# Altium PCB Smartknob.PcbDoc (part 2 of 2)
Units mm, origin at the board's own origin, x right, y up, seen from the top; angles counter-clockwise.
Board outline 81.2 x 81.2 mm, 4 copper layers (Top Layer, Int1, Int2, Bottom Layer), stack 1.109 mm thick; 105 components, 69 nets, 354 pads, 140 vias.
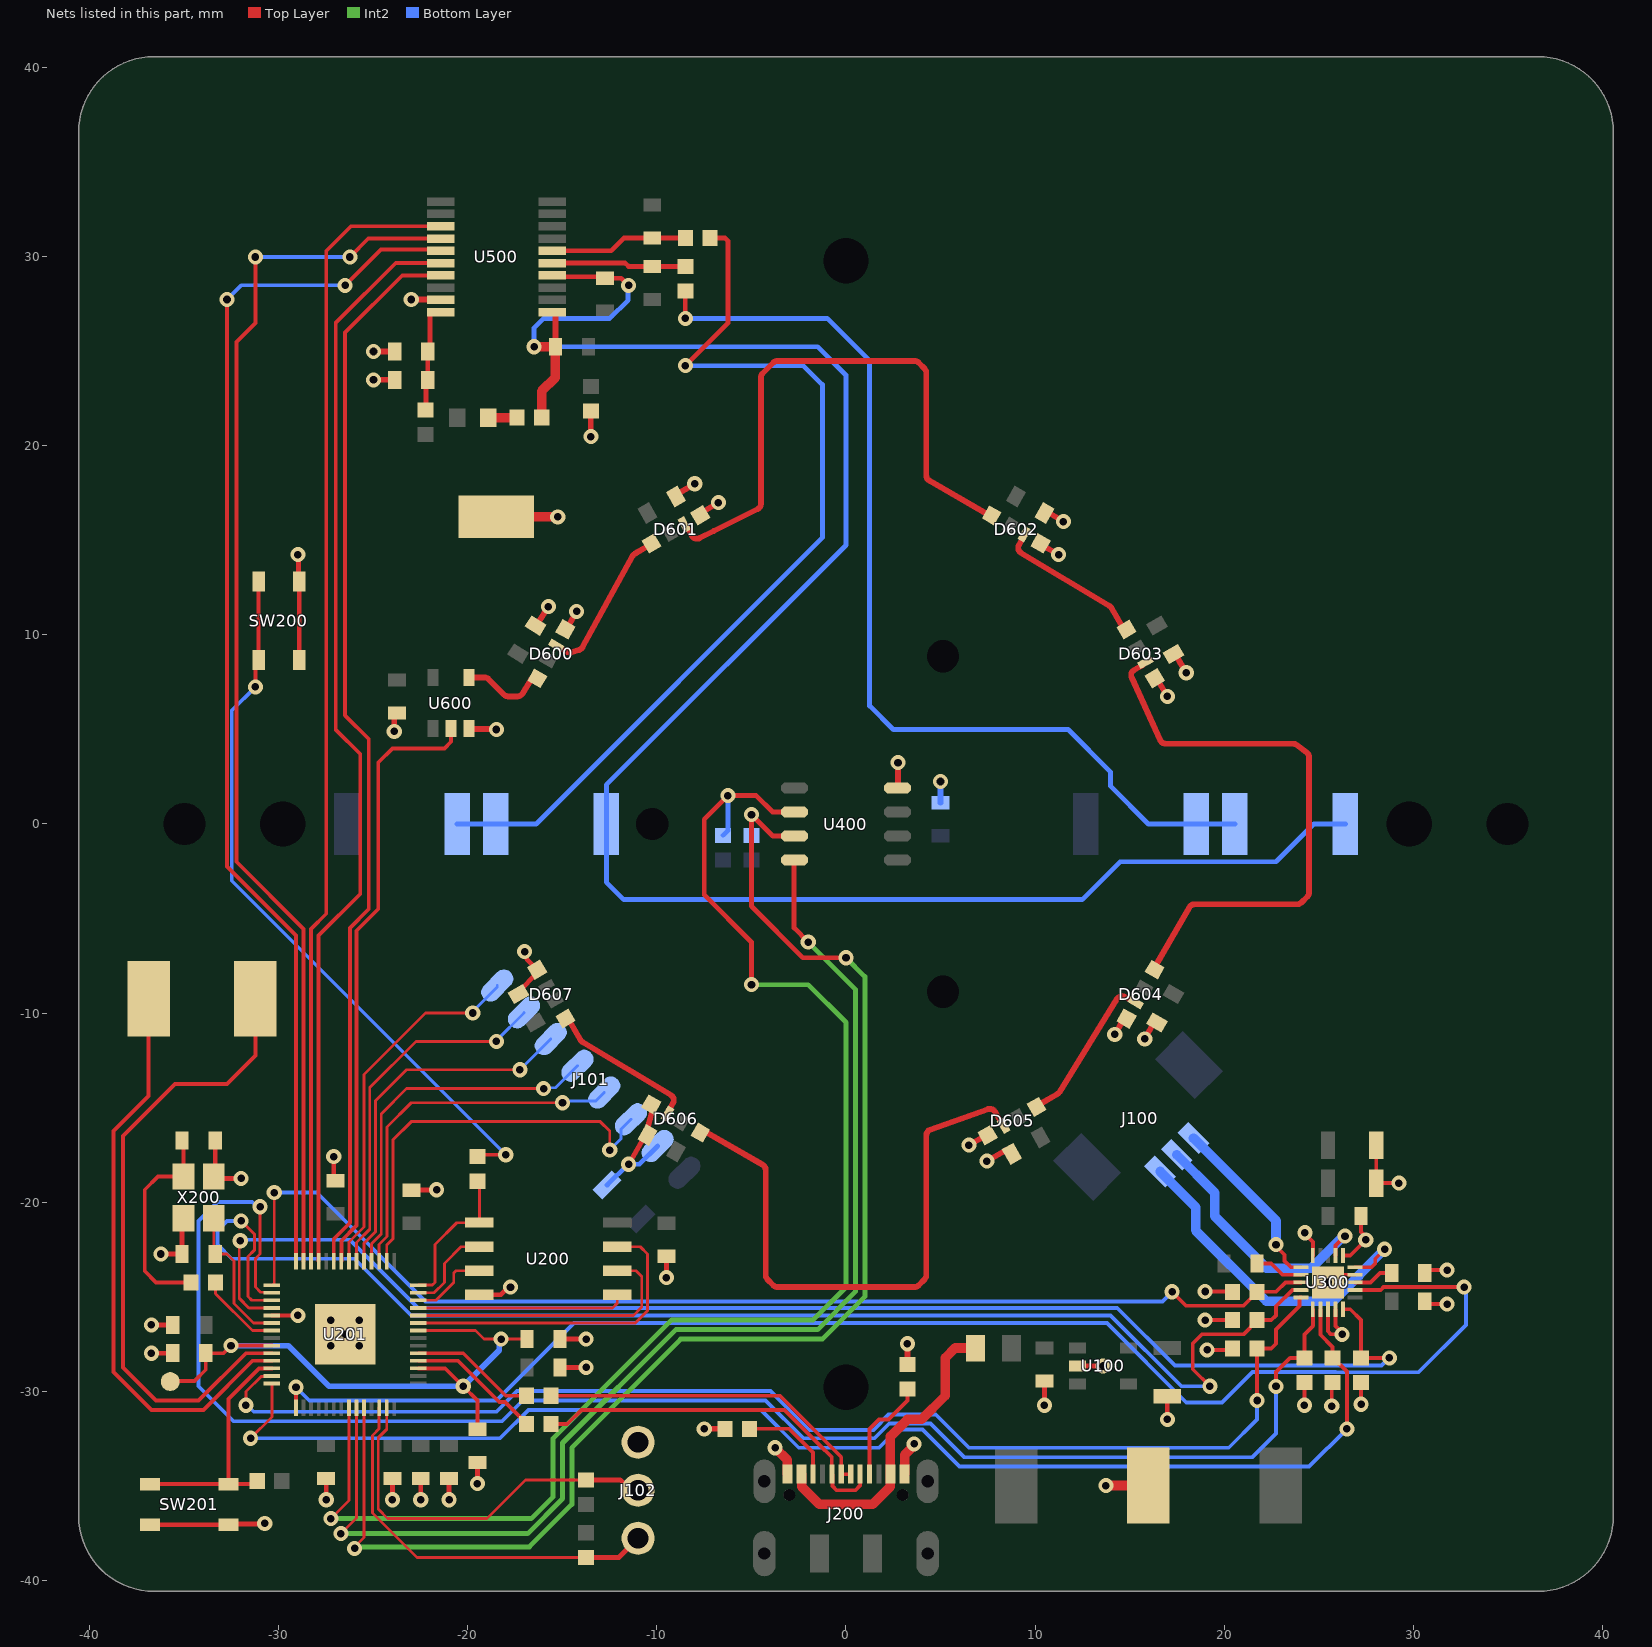
[diagram p4: the nets of this part, all layers, seen from the top]

## Via types
v1: diameter 0.8, hole 0.4, Top Layer to Bottom Layer, tented both sides, 140 vias

## Nets (pads, with @x,y where several pads share a name; then routed paths per layer and width w, separated by ;. In a path a pad name is that pad's centre, name@x,y a point inside that pad or via, vN(x,y) a via of type N, cw(c..) or ccw(c..) an arc to the next point about the centre after c; other vN are vias at no path point) (continued)
GND: C100.2 C101.2 C102.2 C200.2 C201.2 C202.2 C203.2 C204.2 C205.2 C206.2 C207.2 C208.2 C209.2 C210.2 C211.2 C212.1 C213.1 C301.2 C302.2 C303.2 C304.2 C305.2 C400.2 C502.2 C503.1 C600.2 C601.2 C602.2 C603.2 C604.2 C605.2 C606.2 C607.2 C608.2 D600.4 D601.4 D602.4 D603.4 D604.4 D605.4 D606.4 D607.4 J101.2 J102.3 J200.1 J200.12 R201.1 R204.1 R300.1 R301.1 R302.1 R303.1 R304.1 R305.1 R508.2 SW200.1 SW201.1 TP100.1 TP101.1 U100.2 U200.4 U201.19 U201.GND U300.8 U300.9 U300.14 U300.16 U300.20 U300.21 U400.4 U500.19 U600.3 X200.2 X200.4 | length 108.2
  Top Layer w0.203: U201.19@-30.375,-26 v1(-29,-26) ; v1(19,-26.244) 20.444,-26.244 R301.1@20.45,-26.25 ; v1(19,-24.733) 20.433,-24.733 R300.1@20.45,-24.75 ; v1(19.102,-27.822) 20.378,-27.822 R302.1@20.45,-27.75 ; v1(24.25,-30.75) R303.1@24.25,-29.55 ; v1(24.282,-21.629) 24.282,-21.702 24.7,-22.12 U300.20@24.7,-22.825 ; U300.8@25.5,-25.675 25.5,-26.839 25.661,-27 v1(26.25,-27) 26.25,-26.911 25.9,-26.561 U300.9@25.9,-25.675 ; v1(25.5,-24.25) 25.9,-23.85 U300.14@26.925,-23.85 ; v1(25.7,-30.8) 25.7,-29.6 R305.1@25.75,-29.55 ; U300.16@26.3,-22.825 26.675,-22.825 v1(27.5,-22) 27.5,-21.839 27.25,-21.589 C301.2@27.25,-20.75 ; R304.1@27.25,-29.55 27.256,-29.556 v1(27.256,-30.7) ; C303.2@28.05,-17 C302.2@28.05,-19 v1(29.25,-19) ; C305.2@30.625,-25.25 30.775,-25.4 v1(31.8,-25.4) ; C304.2@30.625,-23.75 30.775,-23.6 v1(31.8,-23.6)
  Top Layer w0.254: SW201.1@-36.825,-37.075 SW201.1@-32.675,-37.075 -32.637,-37.037 -30.787,-37.037 v1(-30.75,-37) ; v1(-36.75,-28) C210.2@-35.625,-28 ; v1(-36.75,-26.5) C204.2@-35.625,-26.5 ; v1(-36.25,-22.75) C213.1@-35.125,-22.75 -35.125,-20.925 X200.4@-35.05,-20.85 ; C212.1@-33.375,-16.75 -33.375,-18.575 X200.2@-33.45,-18.65 -33.35,-18.75 v1(-32,-18.75) ; v1(-29,14.25) -28.962,14.212 -28.962,12.862 SW200.1@-28.925,12.825 SW200.1@-28.925,8.675 ; v1(-27.5,-35.75) C201.2@-27.5,-34.625 ; v1(-27.1,-17.6) -27.1,-18.775 C202.2@-27,-18.875 ; v1(-24,-35.75) C203.2@-24,-34.625 ; C206.2@-23,-19.375 -22.988,-19.363 -21.673,-19.363 v1(-21.661,-19.351) ; v1(-22.5,-35.75) C207.2@-22.5,-34.625 ; v1(-21,-35.75) C208.2@-21,-34.625 ; v1(-19.5,-34.9) C209.2@-19.5,-33.775 ; U200.4@-19.395,-24.905 -18.258,-24.905 -17.853,-24.5 v1(-17.75,-24.5) ; C608.2@-17.325,-8.992 -17.325,-8.868 -16.335,-7.878 D607.4@-16.335,-7.707 -16.896,-7.147 -16.896,-6.854 v1(-17,-6.75) ; C205.2@-15.125,-28.75 v1(-13.75,-28.75) ; C211.2@-15.125,-27.25 v1(-13.75,-27.25) ; v1(-11.5,-18) -10.755,-16.709 C607.2@-10.508,-16.45 ; v1(-9.5,-24) C200.2@-9.5,-22.875 ; v1(10.5,-30.75) C101.2@10.5,-29.475 ; U100.2@12.25,-28.675 v1(13.6,-28.675) ; v1(17,-31.5) C100.2@17,-30.275
  Top Layer w0.305: v1(-25,23.5) C502.2@-23.875,23.5 ; v1(-25,25) C503.1@-23.875,25 ; v1(-23.9,4.9) -23.9,5.725 C600.2@-23.75,5.875 ; v1(-23,27.75) -22.023,27.75 U500.19@-21.45,27.725 ; U600.3@-19.95,5.05 -19.925,5.025 -18.525,5.025 v1(-18.5,5) ; C601.2@-16.422,10.491 -16.289,10.641 v1(-15.75,11.5) ; D600.4@-14.842,10.293 -14.689,10.49 v1(-14.25,11.25) ; v1(-13.5,20.5) R508.2@-13.5,21.85 ; C607.2@-10.508,-16.45 -10.57,-16.342 -10.207,-14.99 D606.4@-10.293,-14.842 D606.4@-10.372,-14.705 ; C602.2@-8.992,17.325 -8.865,17.5 v1(-8,18) ; D601.4@-7.707,16.335 -7.542,16.543 v1(-6.75,17) ; v1(-7.5,-32) R201.1@-6.4,-32 ; U400.4@2.725,1.905 2.75,1.905 v1(2.75,3.25) ; R204.1@3.25,-28.6 v1(3.25,-27.5) ; v1(6.499,-16.993) 7.259,-16.554 D605.4@7.491,-16.46 ; v1(7.457,-17.834) 8.443,-17.269 C606.2@8.776,-17.45 ; D602.4@10.293,14.842 10.49,14.689 v1(11.25,14.25) ; C603.2@10.508,16.45 10.732,16.443 v1(11.5,16) ; v1(14.221,-11.131) 14.615,-10.447 D604.4@14.842,-10.293 ; v1(15.803,-11.372) 16.24,-10.615 C605.2@16.45,-10.508 ; D603.4@16.335,7.707 16.543,7.542 v1(17,6.75) ; C604.2@17.325,8.992 17.5,8.865 v1(18,8)
  Top Layer w0.508: TP101.1@-18.5,16.25 v1(-15.25,16.25) ; v1(-3.75,-33) -3.106,-33.644 -3.106,-34.394 J200.1@-3.1,-34.4 ; J200.12@3.1,-34.4 3.1,-33.379 3.6,-32.879 v1(3.6,-32.8) ; v1(13.75,-35) TP100.1@16,-35
  Bottom Layer w0.254: C102.2@-12.652,-19.098 -12.625,-19.098 -11.527,-18 v1(-11.5,-18) -10.929,-18 J101.2@-9.964,-17.036
  Bottom Layer w0.305: C400.2@5,1.125 5,1.323 v1(5,2.25)
  other v1: -27.25,-27.596 -25.75,-27.596 -26.5,-27 -27.25,-26.25 -25.75,-26.25
NetC209_1: C209.1 C210.1 C211.1 TP200.1 U201.23 U201.45 U201.50 | length 34.5
  Top Layer w0.152: U201.50@-22.625,-26.8 -19.6,-26.8 -19.15,-27.25 v1(-18.25,-27.25) C211.1@-16.875,-27.25
  Top Layer w0.203: TP200.1@-35.75,-29.5 -35.726,-29.476 -34.476,-29.476 -33.875,-28.875 C210.1@-33.875,-28 -32.938,-28 v1(-32.538,-27.6) U201.23@-30.375,-27.6 ; U201.45@-22.625,-28.8 -21.2,-28.8 -20.256,-29.744 v1(-20.25,-29.744) ; v1@-20.25,-29.75 -19.5,-30.5 C209.1@-19.5,-32.025
  Bottom Layer w0.305: v1(-32.538,-27.6) -29.5,-27.6 -27.35,-29.75 -20.256,-29.75 v1(-20.25,-29.744) ; v1@-20.25,-29.75 -18.345,-27.845 -18.345,-27.345 v1(-18.25,-27.25)
NetC212_2: C212.2 R205.1 X200.3 | length 11.3
  Top Layer w0.203: C212.2@-35.125,-16.75 -35.05,-16.825 X200.3@-35.05,-18.65 -36.4,-18.65 -37.1,-19.35 -37.1,-23.65 -36.5,-24.25 R205.1@-34.65,-24.25
NetC300_2: C300.2 U300.2 | length 2.6
  Top Layer w0.203: C300.2@21.75,-23.25 22.5,-23.25 23.1,-23.85 U300.2@24.075,-23.85
NetC304_1: C304.1 U300.13 | length 2.2
  Top Layer w0.203: U300.13@26.925,-24.25 27.75,-24.25 28.25,-23.75 C304.1@28.875,-23.75
NetC500_1: C500.1 C501.1 R500.1 R502.2 R503.2 U500.1 U500.4 | length 109.1
  Top Layer w0.254: U500.4@-15.55,29.025 -15.475,28.95 -12.825,28.95 C501.1@-12.75,28.875 -11.901,28.875 -11.526,28.5 v1(-11.5,28.5)
  Top Layer w0.305: U500.1@-15.55,27.075 -15.448,27.075 -15.375,27.002 C500.1@-15.375,25.25
  Top Layer w0.508: v1(-16.5,25.25) C500.1@-15.375,25.25 -15.375,23.625 -16.1,22.9 R500.1@-16.1,21.5
  Bottom Layer w0.254: v1(-11.5,28.5) -11.531,28.469 -11.531,27.719 -12.5,26.75 -16,26.75 -16.5,26.25 v1(-16.5,25.25) -1.5,25.25 0,23.75 0,14.75 -12.675,2.075 R503.2@-12.675,0 -12.675,-3.075 -11.75,-4 12.5,-4 14.5,-2 22.75,-2 24.75,0 R502.2@26.425,0
NetC502_1: C502.1 C503.2 R501.1 U500.20 | length 5.7
  Top Layer w0.254: R501.1@-22.25,21.9 -22.229,22.173 -22.229,23.152 C502.1@-22.125,23.5 C503.2@-22.125,25 -22.012,25.348 -22.012,26.977 U500.20@-21.45,27.075
NetD600_1: D600.1 U600.4 | length 4.5
  Top Layer w0.305: U600.4@-19.95,7.75 -19.802,7.75 -19.126,7.75 cw(c-19.126,7.445) -18.91,7.66 -18.089,6.839 ccw(c-17.874,7.055) -17.875,6.751 -17.38,6.75 ; -17.379,6.75 ccw(c-17.38,7.055) -17.121,6.895 -16.66,7.638 D600.1@-16.335,7.707
NetD600_3: D600.3 D601.1 | length 8.3
  Top Layer w0.305: D600.3@-15.332,9.444 -15.119,9.318 -14.754,9.108 -14.752,9.107 ccw(c-14.601,9.372) -14.507,9.082 -14.113,9.213 ccw(c-14.209,9.502) -13.942,9.355 -11.288,14.18 cw(c-11.022,14.033) -11.174,14.297 -10.47,14.704 D601.1@-10.293,14.842
NetD601_3: D601.3 D602.1 | length 30.7
  Top Layer w0.305: D601.3@-8.556,15.845 -8.391,15.654 -8.145,15.243 -8.144,15.241 ccw(c-7.883,15.399) -7.746,15.127 -7,15.5 -4.668,16.666 ccw(c-4.805,16.938) -4.501,16.938 -4.5,18.5 -4.5,23.624 cw(c-4.195,23.624) -4.411,23.839 -3.839,24.411 cw(c-3.624,24.195) -3.624,24.5 3.624,24.5 cw(c3.624,24.195) 3.84,24.41 4.161,24.089 cw(c3.945,23.874) 4.249,23.874 4.25,18.43 ; 4.25,18.428 ccw(c4.555,18.43) 4.402,18.166 7.481,16.388 D602.1@7.707,16.335
NetD602_3: D602.3 D603.1 | length 8.1
  Top Layer w0.305: D602.3@9.444,15.332 9.348,15.102 9.15,14.76 ccw(c9.414,14.607) 9.258,14.345 13.944,11.534 ; 13.945,11.533 cw(c13.787,11.272) 14.051,11.425 14.628,10.426 D603.1@14.842,10.293
NetD603_3: D603.3 D604.1 | length 30.7
  Top Layer w0.305: 15.233,8.139 ccw(c15.39,7.878) 15.113,7.751 16.623,4.429 ccw(c16.901,4.555) 16.9,4.25 23.648,4.25 cw(c23.648,3.945) 23.831,4.189 24.378,3.779 cw(c24.195,3.535) 24.5,3.535 24.5,-3.624 cw(c24.195,-3.624) 24.411,-3.839 24.089,-4.161 cw(c23.874,-3.945) 23.874,-4.25 19.25,-4.25 18.43,-4.25 ccw(c18.43,-4.555) 18.165,-4.403 16.388,-7.481 D604.1@16.335,-7.707 ; 15.234,8.14 15.654,8.391 D603.3@15.845,8.556
NetD604_3: D604.3 D605.1 | length 8.4
  Top Layer w0.305: D605.1@10.076,-14.967 10.253,-14.828 11.181,-14.292 ccw(c11.029,-14.028) 11.288,-14.188 14.344,-9.251 cw(c14.604,-9.412) 14.755,-9.147 15.102,-9.348 D604.3@15.332,-9.444
NetD605_3: D605.3 D606.1 | length 31.1
  Top Layer w0.305: D606.1@-7.707,-16.335 -7.421,-16.284 -4.403,-18.027 cw(c-4.555,-18.291) -4.25,-18.291 -4.25,-23.874 ccw(c-3.945,-23.874) -4.161,-24.089 -3.838,-24.412 ccw(c-3.624,-24.195) -3.626,-24.5 3.624,-24.5 ccw(c3.624,-24.195) 3.839,-24.411 4.162,-24.088 ccw(c3.945,-23.874) 4.25,-23.874 4.25,-16.465 cw(c4.555,-16.465) 4.452,-16.178 7.511,-15.085 cw(c7.613,-15.373) 7.877,-15.219 ; 7.877,-15.22 8.194,-15.768 D605.3@8.34,-15.97
NetD606_3: D606.3 D607.1 | length 8.1
  Top Layer w0.305: D607.1@-14.842,-10.293 -14.628,-10.426 -14.051,-11.425 ccw(c-13.787,-11.272) -13.945,-11.533 ; -13.944,-11.534 -9.257,-14.346 cw(c-9.414,-14.607) -9.15,-14.76 -9.348,-15.102 D606.3@-9.444,-15.332
NetF200_1: F200.1 J200.2 J200.11 | length 16.4
  Top Layer w0.508: J200.2@-2.35,-34.4 -2.344,-34.406 -2.344,-35.056 -1.4,-36 1.4,-36 2.344,-35.056 2.344,-34.406 J200.11@2.35,-34.4 2.35,-32.4 3.25,-31.5 4,-31.5 5.25,-30.25 5.25,-28.25 5.775,-27.725 F200.1@6.85,-27.725
NetFB500_1: FB500.1 R500.2 | length 1.5
  Top Layer w0.508: FB500.1@-18.93,21.5 R500.2@-17.4,21.5
NetJ100_1: J100.1 U300.15 | length 18.7
  Top Layer w0.203: U300.15@26.925,-23.45 27.8,-23.45 28,-23.25 28,-23 v1(28.5,-22.5)
  Bottom Layer w0.508: J100.1@16.616,-18.384 18.5,-20.268 18.5,-21.5 22.25,-25.25 25.784,-25.25 27.14,-23.894 27.14,-23.86 v1(28.5,-22.5)
NetJ100_2: J100.2 U300.17 | length 14.1
  Top Layer w0.203: U300.17@25.9,-22.825 U300.17@25.9,-22.825 25.902,-22.298 v1(26.4,-21.8)
  Bottom Layer w0.508: J100.2@17.5,-17.5 19.5,-19.5 19.5,-20.75 22.25,-23.5 24.623,-23.5 26.323,-21.8 v1(26.4,-21.8)
NetJ100_3: J100.3 U300.1 | length 9.5
  Top Layer w0.203: v1(22.75,-22.25) 22.75,-22.34 23.203,-22.793 23.203,-23.112 23.543,-23.452 24.073,-23.452 U300.1@24.075,-23.45
  Bottom Layer w0.508: J100.3@18.384,-16.616 22.75,-20.982 v1(22.75,-22.25)
NetJ101_3: J101.3 U201.2 | length 21.7
  Top Layer w0.152: U201.2@-24.3,-23.125 -24.3,-22.274 -23.976,-21.95 -23.976,-16.726 -23,-15.75 -13,-15.75 -12.5,-16.25 v1(-12.5,-17.25)
  Bottom Layer w0.152: v1(-12.5,-17.25) -11.894,-16.644 -11.894,-16.137 J101.3@-11.379,-15.621
NetJ101_4: J101.4 U201.3 | length 19.5
  Top Layer w0.152: U201.3@-24.7,-23.125 -24.7,-22.243 -24.281,-21.824 -24.281,-16.031 -23,-14.75 v1(-15,-14.75)
  Bottom Layer w0.152: v1(-15,-14.75) -14.905,-14.655 -13.241,-14.655 J101.4@-12.793,-14.207
NetJ101_5: J101.5 U201.4 | length 19.4
  Top Layer w0.152: U201.4@-25.1,-23.125 -25.1,-22.212 -24.586,-21.698 -24.586,-15.336 -23.25,-14 v1(-16,-14)
  Bottom Layer w0.152: v1(-16,-14) -15.957,-13.957 -15.371,-13.957 J101.5@-14.207,-12.793
NetJ101_6: J101.6 U201.5 | length 19.4
  Top Layer w0.152: U201.5@-25.5,-23.125 -25.5,-22.181 -24.89,-21.571 -24.89,-14.64 -23.25,-13 v1(-17.25,-13)
  Bottom Layer w0.152: v1(-17.25,-13) -17.246,-13 -15.625,-11.379 J101.6@-15.621,-11.379
NetJ101_7: J101.7 U201.6 | length 19.3
  Top Layer w0.152: U201.6@-25.9,-23.125 -25.9,-22.15 -25.195,-21.445 -25.195,-13.945 -22.75,-11.5 v1(-18.5,-11.5)
  Bottom Layer w0.152: v1(-18.5,-11.5) -18.5,-11.464 -17.036,-10 J101.7@-17.036,-9.964
NetJ101_8: J101.8 U201.7 | length 19.3
  Top Layer w0.152: U201.7@-26.3,-23.125 -26.3,-22.119 -25.5,-21.319 -25.5,-13.25 -22.25,-10 v1(-19.75,-10)
  Bottom Layer w0.152: v1(-19.75,-10) -19.75,-9.925 -18.45,-8.625 J101.8@-18.45,-8.55
NetJ102_1: J102.1 R100.1 U201.40 | length 21.2
  Top Layer w0.152: U201.40@-24.7,-30.875 -24.7,-31.996 -25.055,-32.35 -25.055,-36.445 -22.7,-38.8 R100.1@-13.75,-38.8
  Top Layer w0.254: R100.1@-13.75,-38.8 -12.01,-38.8 J102.1@-11,-37.79
NetJ102_2: J102.2 R101.1 U201.41 | length 20.6
  Top Layer w0.152: U201.41@-24.3,-30.875 -24.3,-32.027 -24.75,-32.477 -24.75,-36.25 -24.25,-36.75 -19,-36.75 -16.95,-34.7 R101.1@-13.75,-34.7
  Top Layer w0.254: R101.1@-13.75,-34.7 -11.955,-34.7 -11.405,-35.25 J102.2@-11,-35.25
NetJ200_3: J200.3 R201.2 | length 5
  Top Layer w0.203: R201.2@-5.1,-32 -3,-32 -1.75,-33.25 J200.3@-1.75,-34.4
NetJ200_5: J200.5 J200.8 R203.2 | length 20
  Top Layer w0.203: R203.2@-15.6,-31.75 -14.75,-31.75 -14.001,-31.001 -3.251,-31.001 -1.397,-32.856 -0.75,-33.503 J200.5@-0.75,-34.4 -0.717,-34.433 -0.717,-35.033 -0.5,-35.25 0.5,-35.25 0.75,-35 J200.8@0.75,-34.4
NetJ200_6: J200.6 J200.7 R202.2 | length 18.1
  Top Layer w0.203: R202.2@-15.6,-30.25 -3.5,-30.25 -1.25,-32.5 -0.25,-33.5 J200.6@-0.25,-34.4 J200.7@0.25,-34.4
NetJ200_9: J200.9 R204.2 | length 5.6
  Top Layer w0.203: J200.9@1.25,-34.4 1.25,-32 1.75,-31.5 2.25,-31.5 3.25,-30.5 R204.2@3.25,-29.9
NetR200_1: R200.1 SW200.2 | length 38.5
  Top Layer w0.203: v1(-31.25,7.25) -31.25,8.5 SW200.2@-31.075,8.675 SW200.2@-31.075,12.825 ; R200.1@-19.5,-17.6 -19.4,-17.5 v1(-18,-17.5)
  Bottom Layer w0.203: v1(-31.25,7.25) -32.5,6 -32.5,-3 v1(-18,-17.5)
NetR202_1: R202.1 U201.47 | length 6.7
  Top Layer w0.203: U201.47@-22.625,-28 -20.25,-28 -18,-30.25 R202.1@-16.9,-30.25
NetR203_1: R203.1 U201.46 | length 7.1
  Top Layer w0.203: U201.46@-22.625,-28.4 -20.526,-28.4 -18.346,-30.58 -18.045,-30.58 -16.9,-31.725 R203.1@-16.9,-31.75
NetR206_1: R206.1 SW201.2 U201.26 | length 13.2
  Top Layer w0.203: SW201.2@-36.825,-34.925 SW201.2@-32.675,-34.925 ; R206.1@-31.15,-34.75 -31.325,-34.925 SW201.2@-32.675,-34.925 ; U201.26@-30.375,-28.8 -30.377,-28.802 -31.052,-28.802 -32.675,-30.425 SW201.2@-32.675,-34.925
NetR300_2: R300.2 U201.15 U300.3 | length 62.8
  Top Layer w0.152: U201.15@-30.375,-24.4 -30.274,-24.4 -30.25,-24.376 v1(-30.25,-19.5)
  Top Layer w0.203: v1(17.25,-24.75) 17.989,-25.489 21.036,-25.489 21.75,-24.775 R300.2@21.75,-24.75 22.75,-24.75 23.25,-24.25 U300.3@24.075,-24.25
  Bottom Layer w0.203: v1(-30.25,-19.5) -28,-19.5 -22.244,-25.256 16.744,-25.256 v1(17.25,-24.75)
NetR301_2: R301.2 U201.17 U300.4 | length 73.4
  Top Layer w0.152: v1(-32,-21) -31.305,-21.695 -31.305,-22.555 -31.64,-22.89 -31.64,-25 -31.44,-25.2 U201.17@-30.375,-25.2
  Top Layer w0.203: v1(19.25,-29.75) 18.346,-28.846 18.346,-27.479 18.825,-27 21.025,-27 21.75,-26.275 R301.2@21.75,-26.25 22.5,-26.25 22.75,-26 22.75,-25.516 23.614,-24.652 24.073,-24.652 U300.4@24.075,-24.65
  Bottom Layer w0.203: v1(-32,-21) -32.75,-21 -33.25,-21.5 -33.25,-22.25 -32.5,-23 -26,-23 -23,-26 14,-26 17.75,-29.75 v1(19.25,-29.75)
NetR302_2: R302.2 U201.27 U300.5 | length 67
  Top Layer w0.152: v1(-31.75,-30.75) -31.75,-30.033 -30.941,-29.224 -30.399,-29.224 U201.27@-30.375,-29.2
  Top Layer w0.203: v1(21.75,-30.5) R302.2@21.75,-27.75 22.5,-27.75 22.75,-27.5 22.75,-26.75 24,-25.5 24,-25.052 24.002,-25.05 U300.5@24.075,-25.05
  Bottom Layer w0.203: v1(-31.75,-30.75) -31.683,-30.75 -31.333,-31.1 -18.5,-31.1 -17.4,-30 -4,-30 -1.946,-32.054 1.446,-32.054 2.25,-31.25 4.75,-31.25 6.5,-33 20.25,-33 21.75,-31.5 v1(21.75,-30.5)
NetR303_2: R303.2 U201.16 U300.6 | length 86.3
  Top Layer w0.152: v1(-31,-20.25) -31,-22.75 -31.25,-23 -31.25,-24.5 -30.974,-24.776 -30.399,-24.776 U201.16@-30.375,-24.8
  Top Layer w0.203: v1(22.75,-29.754) 22.75,-29 23.5,-28.25 R303.2@24.25,-28.25 24.25,-27 24.7,-26.55 U300.6@24.7,-25.675
  Bottom Layer w0.203: v1(-31,-20.25) -31.161,-20.25 -31.411,-20 -33.25,-20 -34.25,-21 -34.25,-29.75 -32.4,-31.6 -18.2,-31.6 -17.1,-30.5 -4.25,-30.5 -2.25,-32.5 1.503,-32.5 2.289,-31.714 4.464,-31.714 6.25,-33.5 21.5,-33.5 22.75,-32.25 v1(22.75,-29.754)
NetR304_2: R304.2 U201.18 U300.10 | length 73.4
  Top Layer w0.152: v1(-32.05,-22.05) -32.1,-22.1 -32.1,-25.095 -31.595,-25.6 U201.18@-30.375,-25.6
  Top Layer w0.203: U300.10@26.3,-25.675 26.675,-25.675 27.25,-26.25 R304.2@27.25,-28.25 v1(28.75,-28.25)
  Bottom Layer w0.203: v1(-32.05,-22.05) -32,-22 -26.25,-22 -22.65,-25.6 14.35,-25.6 17.4,-28.65 28.333,-28.65 28.733,-28.25 v1(28.75,-28.25)
NetR305_2: R305.2 U201.28 U300.7 | length 71.8
  Top Layer w0.152: v1(-31.5,-32.5) -30.375,-31.375 U201.28@-30.375,-29.6
  Top Layer w0.203: U300.7@25.1,-25.675 25.1,-27.025 25.739,-27.664 25.739,-28.239 R305.2@25.75,-28.25 25.775,-28.25 26.5,-28.975 v1(26.5,-32)
  Bottom Layer w0.203: v1(-31.5,-32.5) -18.3,-32.5 -16.8,-31 -4.5,-31 -2.5,-33 1.75,-33 2.706,-32.044 4.044,-32.044 6,-34 24.5,-34 v1(26.5,-32)
NetR400_1: R400.1 U201.36 U400.6 | length 77.9
  Top Layer w0.152: v1(-27.25,-36.75) -26.3,-35.8 U201.36@-26.3,-30.875
  Top Layer w0.254: v1(-5,-8.5) -5,-6.25 -7.5,-3.75 -7.5,0.25 v1(-6.25,1.5) -4.75,1.5 -3.885,0.635 U400.6@-2.725,0.635
  Int2 w0.254: v1(-27.25,-36.75) -16.65,-36.75 -15.5,-35.6 -15.5,-32.5 -9.25,-26.25 -1.75,-26.25 0,-24.5 0,-10.5 -2,-8.5 v1(-5,-8.5)
  Bottom Layer w0.254: R400.1@-6.5,-0.6 -6.25,-0.35 v1(-6.25,1.5)
NetR401_1: R401.1 U201.38 U400.7 | length 75.1
  Top Layer w0.152: v1(-26,-38.323) -26,-38.25 -25.5,-37.75 U201.38@-25.5,-30.875
  Top Layer w0.254: U400.7@-2.725,-0.635 -3.865,-0.635 v1(-5,0.5) -5,-4.355 -2.279,-7.075 v1(0,-7.075)
  Int2 w0.254: v1(-26,-38.323) -25.927,-38.25 -16.75,-38.25 -14.5,-36 -14.5,-33 -8.75,-27.25 -1.25,-27.25 1,-25 1,-8.075 v1(0,-7.075)
  Bottom Layer w0.254: R401.1@-5,-0.6 v1(-5,0.5)
NetR502_1: R502.1 R504.2 R506.2 | length 52.7
  Top Layer w0.254: v1(-8.5,26.75) R504.2@-8.5,28.2
  Bottom Layer w0.254: v1(-8.5,26.75) -1,26.75 1.25,24.5 1.25,6.25 2.5,5 11.75,5 14,2.75 14,2 16,0 R506.2@18.525,0 R502.1@20.575,0
NetR503_1: R503.1 R505.1 R507.2 | length 49.9
  Top Layer w0.254: v1(-8.5,24.25) -6.25,26.5 -6.25,30.851 -6.399,31 R505.1@-7.2,31
  Bottom Layer w0.254: R507.2@-20.575,0 R503.1@-18.525,0 -16.399,0 -1.25,15.149 -1.25,23.25 -2.25,24.25 v1(-8.5,24.25)
NetTP201_1: TP201.1 U201.25 | length 30.8
  Top Layer w0.203: TP201.1@-36.899,-9.236 -36.899,-14.399 -38.75,-16.25 -38.75,-29 -36.75,-31 -34,-31 -31.4,-28.4 U201.25@-30.375,-28.4
NetTP202_1: TP202.1 U201.24 | length 33.6
  Top Layer w0.203: TP202.1@-31.25,-9.25 -31.25,-12.25 -32.75,-13.75 -35.5,-13.75 -38.25,-16.5 -38.25,-28.75 -36.5,-30.5 -34.25,-30.5 -31.75,-28 U201.24@-30.375,-28
NetU201_8: U201.8 U600.2 | length 32.2
  Top Layer w0.203: U201.8@-26.7,-23.125 -26.7,-22.052 -25.894,-21.246 -25.894,-5.647 -24.75,-4.503 -24.75,3.25 -24,4 -21.25,4 -20.9,4.35 U600.2@-20.9,5.05
NetU201_9: U201.9 U500.17 | length 56.7
  Top Layer w0.203: U201.9@-27.1,-23.125 -27.1,-21.949 -26.25,-21.099 -26.25,-5.5 -25.25,-4.5 -25.25,4.5 -26.5,5.75 -26.5,26 -23.475,29.025 U500.17@-21.45,29.025
NetU201_11: U201.11 U500.16 | length 57.9
  Top Layer w0.203: U201.11@-27.9,-23.125 -27.9,-5.9 -25.7,-3.7 -25.7,3.7 -27,5 -27,26.5 -23.825,29.675 U500.16@-21.45,29.675
NetU201_12: U201.12 U500.13 | length 60.4
  Top Layer w0.203: U201.12@-28.3,-23.125 -28.3,-5.55 -27.5,-4.75 -27.5,30.319 -26.194,31.625 U500.13@-21.45,31.625
NetU201_13: U201.13 U500.14 | length 65.3
  Top Layer w0.203: v1(-31.25,30) -31.25,26.5 -32.25,25.5 -32.25,-2 -28.7,-5.55 U201.13@-28.7,-23.125 ; v1(-26.25,30) -25.275,30.975 U500.14@-21.45,30.975
  Bottom Layer w0.203: v1(-31.25,30) -26.478,30 -26.364,30.114 v1(-26.25,30)
NetU201_14: U201.14 U500.15 | length 64.8
  Top Layer w0.203: v1(-32.75,27.75) -32.75,-2.25 -29.1,-5.9 U201.14@-29.1,-23.125 ; v1(-26.5,28.5) -24.605,30.395 -21.52,30.395 U500.15@-21.45,30.325
  Bottom Layer w0.203: v1(-32.75,27.75) -32,28.5 v1(-26.5,28.5)
NetU201_29: U201.29 U300.12 | length 76.3
  Top Layer w0.203: U201.29@-29.1,-30.875 v1(-29.1,-29.8) ; U300.12@26.925,-24.65 28.291,-24.65 28.441,-24.5 v1(32.7,-24.5)
  Bottom Layer w0.203: v1(-29.1,-29.8) -28.4,-30.5 -18.5,-30.5 -14.4,-26.4 13.8,-26.4 18,-30.6 19.9,-30.6 21.502,-28.998 25.894,-28.998 25.902,-29.006 30.294,-29.006 32.8,-26.5 32.8,-24.6 v1(32.7,-24.5)
NetU201_37: U201.37 U400.8 | length 65.5
  Top Layer w0.152: v1(-26.722,-37.542) -26.718,-37.542 -25.9,-36.725 U201.37@-25.9,-30.875
  Top Layer w0.254: U400.8@-2.725,-1.905 -2.75,-1.93 -2.75,-5.5 v1(-2,-6.25)
  Int2 w0.254: v1(-26.722,-37.542) -16.842,-37.542 -15,-35.7 -15,-32.75 -9,-26.75 -1.5,-26.75 0.5,-24.75 0.5,-8.75 v1(-2,-6.25)
QSPI_SCLK: U200.6 U201.52 | length 15
  Top Layer w0.152: U201.52@-22.625,-26 -11.25,-26 -10.805,-25.555 -10.805,-23.945 -11.115,-23.635 U200.6@-12.105,-23.635
QSPI_SD0: U200.5 U201.53 | length 11.1
  Top Layer w0.152: U201.53@-22.625,-25.6 -12.35,-25.6 -12.105,-25.355 U200.5@-12.105,-24.905
QSPI_SD1: U200.2 U201.55 | length 4.8
  Top Layer w0.152: U201.55@-22.625,-24.8 -21.8,-24.8 -21.25,-24.25 -21.25,-23.25 -20.365,-22.365 U200.2@-19.395,-22.365
QSPI_SD2: U200.3 U201.54 | length 4.2
  Top Layer w0.152: U201.54@-22.625,-25.2 -21.7,-25.2 -20.75,-24.25 -20.75,-23.75 -20.635,-23.635 U200.3@-19.395,-23.635
QSPI_SD3: U200.7 U201.51 | length 17.2
  Top Layer w0.152: U201.51@-22.625,-26.4 -11.15,-26.4 -10.5,-25.75 -10.5,-22.75 -10.885,-22.365 U200.7@-12.105,-22.365
QSPI_SS: R200.2 U200.1 U201.56 | length 8
  Top Layer w0.152: U201.56@-22.625,-24.4 -21.9,-24.4 -21.75,-24.25 -21.75,-22.25 -20.595,-21.095 U200.1@-19.395,-21.095 -19.395,-19.005 R200.2@-19.5,-18.9
SENSE+: C504.1 R504.1 U500.5 | length 7.1
  Top Layer w0.254: U500.5@-15.55,29.675 -11.675,29.675 -11.5,29.5 C504.1@-10.25,29.5 R504.1@-8.5,29.5
SENSE-: C505.1 R505.2 U500.6 | length 7.3
  Top Layer w0.254: U500.6@-15.55,30.325 -12.425,30.325 -11.75,31 C505.1@-10.25,31 R505.2@-8.5,31
XIN: C213.2 U201.20 X200.1 | length 7.8
  Top Layer w0.152: X200.1@-33.45,-20.85 -33.45,-22.675 C213.2@-33.375,-22.75 -32.75,-22.75 -32.379,-23.121 -32.379,-25.371 -31.35,-26.4 U201.20@-30.375,-26.4
XOUT: R205.2 U201.21 | length 4.4
  Top Layer w0.152: R205.2@-33.35,-24.25 -33.35,-24.85 -31.4,-26.8 U201.21@-30.375,-26.8
pads on no net: D607.3 J100. J200. J200.4 J200.10 J200.S1 J200.S2 J200.S3 J200.S4 J200.S5 J200.S6 M100.1 M101.1 M102.1 M103.1 M104.1 M105.1 M106.1 M107.1 M108.1 U100.4 U201.30 U201.31 U201.32 U201.34 U201.35 U201.39 U300.19 U400.3 U400.5 U500.7 U500.8 U500.9 U500.10 U500.11 U500.12 U500.18 U600.1

## Polygon pours and split planes (outlines as drawn)
+3V3 on Int2 "+3V3_L03_P002" (solid, pour order 2): -41,41 41,41 41,-41 -41,-41
AGND on Int2 "AGND_L03_P000" (solid, pour order 0): -18.75,35 -18.75,20 -6.25,20 -3.75,22.5 -3.75,23.75 -2.5,23.75 -2.5,16.75 -16.75,2.5 -24.25,2.5 -24.25,3.25 -28.75,3.25 -28.75,-2.5 -15.75,-2.5 -13.25,-5 13.25,-5 15.75,-2.5 28.75,-2.5 28.75,2.5 16.75,2.5 2.5,16.75 2.5,35
+3V3 on Top Layer "+3V3_L01_P003" (solid, pour order 3): -8.5,-23.5 -8.7,-23.7 -8.7,-28.8 -8.5,-29 -5.5,-29 -5.5,-24.8 -5.5,-23.9 -5.9,-23.5
no net on Top Overlay "NONET_L-01_P-001" (solid): 2.5,32.5 2.5,25.5 20.5,25.5 20.5,32.5
GND on Int1 "GND_L02_P001" (solid, pour order 1): -41,-41 -41,41 41,41 41,-41

## Keep-outs
Int1:
  region: -18.5,35 -18.5,22.5 -9.25,22.5 -3.75,28 -3.75,35

## Silkscreen, mask and mechanical layers (free items; w line width, h text height)
Top Overlay:
  drawing of 103 lines, arcs and shapes, not listed
  text "RP2040 Smartknob" at 2.5,37.535 h3
  text "Version 1.0 - 13/02/2023" at 2.5,35.524 h2
  text "Serial number" at 2.5,33.524 h2
  text "BOOTSEL" at -34.226,14.75 h2 r270
  text "GND" at -20,13.268 h1.5
  text "SASSY CIRCUITS" at 19.752,7.6 h3.5
  text "WASGOINON?" at 23.502,4.959 h3.5
  text "SWDIO" at -34.018,-11.5 h1.5 r90
  text "SWDCLK" at -28.518,-12.25 h1.5 r90
  text "GPIO1 - TX/SDA" at -9.5,-25.982 h1.5
  text "GPIO2 - RX/SCL" at -9.5,-27.482 h1.5
  text "+1V8" at -37.5,-31.732 h1.5
  text "GND" at -9.5,-33.732 h1.5
  text "GPIO2" at -9.5,-35.982 h1.5
  text "GPIO1" at -9.5,-38.232 h1.5
  text "+3V3" at 21.5,-38.732 h1.5
  text "+5V" at 7.75,-38.982 h1.5
  text "GND" at 14.5,-38.982 h1.5
  text "RESET" at -36,-39.226 h2
Bottom Overlay:
  lines w0.2: -16,-9 -14.75,-7.75 ; -15.5,-6.25 -17.25,-8 ; -13.75,-5 -8.75,-5 -8.25,-5.5 ; -13.5,-9.5 -14.5,-10.5 ; -13.25,-12 -12.25,-11 ; -13,-6.25 -9,-6.25 ; -12,-8.25 -11,-7.25 -9.25,-7.25 ; -11.75,-13.25 -11,-12.5 ; -10.25,-14.75 -9.25,-13.75 ; -9,-16 -7.75,-14.75 ; -9,-8 -10.75,-9.75 ; -7.75,-12 -7.75,-9.25 -9.5,-11 ; -7,-17.25 -5.5,-15.75 ; -6.25,-13 -6.25,-9.25 ; -5.75,-9 -4.75,-10 -4.75,-13.5 ; 7.25,-4.5 7.25,-10 8.75,-11.5 ; 10.5,-13.25 12.25,-15 ; 10.5,-4.5 10.5,-8.75 11,-9.25 ; 12.75,-10.75 14.75,-12.75 ; -17.25,-8 -17.25,-8 ; -14.5,-10.5 -14.5,-10.5 ; -10.75,-9.75 -10.75,-9.75 ; -9.5,-11 -9.5,-11 ; 11,-9.25 11,-9.25
  text "BL" at -20.25,-11.25 h1.5 r45
  text "RST" at -19.013,-12.737 h1.5 r45
  text "MOSI" at -17.513,-13.987 h1.5 r45
  text "CLK" at -15.762,-15.238 h1.5 r45
  text "MOTOR" at 22.767,-15.483 h2 r315
  text "CS" at -14.263,-16.737 h1.5 r45
  text "DC" at -13.012,-17.988 h1.5 r45
  text "W" at 20.75,-18.5 h1.5 r315
  text "V" at 19.25,-19.75 h1.5 r315
  text "GND" at -13.263,-20.237 h1.5 r45
  text "U" at 17.763,-20.987 h1.5 r315
  text "DISPLAY" at -17.483,-21.483 h2 r315
  text "3V3" at -11.513,-22.237 h1.5 r45
Mechanical 3:
  circle w0.1: c-7.071,-7.071 r1.5
  lines w0.1: -16.007,-3.502 cw(c-16.007,-4.002) -15.522,-3.88 ccw(c0,0) -3.881,-15.522 cw(c-4.002,-16.007) -3.502,-16.007 -3.5,-23.29 ccw(c-3,-23.29) -2.5,-23.29 -2.51,-15.205 ccw(c-3.01,-15.205) -2.913,-14.714 cw(c0,0) -14.715,-2.908 ; -16.007,-3.5 -23.29,-3.5 cw(c-23.29,-3) -23.29,-2.5 -15.207,-2.5 cw(c-15.207,-3) -14.716,-2.903 ; -3.502,16.007 cw(c-4.002,16.007) -3.88,15.522 ccw(c0,0) -15.522,3.881 cw(c-16.007,4.002) -16.007,3.502 -23.29,3.5 ccw(c-23.29,3) -23.29,2.5 -15.205,2.51 ccw(c-15.205,3.01) -14.714,2.913 cw(c0,0) -2.908,14.715 ; -3.5,16.007 -3.5,23.29 cw(c-3,23.29) -2.5,23.29 -2.5,15.207 cw(c-3,15.207) -2.903,14.716 ; 2.903,-14.716 ccw(c3,-15.207) 2.5,-15.207 2.5,-23.29 ccw(c3,-23.29) 3.5,-23.29 3.5,-16.007 ; 2.908,-14.715 ccw(c0,0) 14.714,-2.913 cw(c15.205,-3.01) 15.205,-2.51 23.29,-2.5 cw(c23.29,-3) 23.29,-3.5 16.007,-3.502 ccw(c16.007,-4.002) 15.522,-3.88 cw(c0,0) 3.881,-15.522 ccw(c4.002,-16.007) 3.502,-16.007 ; 14.715,2.908 ccw(c0,0) 2.913,14.714 cw(c3.01,15.205) 2.51,15.205 2.5,23.29 cw(c3,23.29) 3.5,23.29 3.502,16.007 ccw(c4.002,16.007) 3.88,15.522 cw(c0,0) 15.522,3.881 ccw(c16.007,4.002) 16.007,3.502 ; 14.716,2.903 ccw(c15.207,3) 15.207,2.5 23.29,2.5 ccw(c23.29,3) 23.29,3.5 16.007,3.5 ; -40.6,-36.6 ccw(c-36.6,-36.6) -36.6,-40.6 36.6,-40.6 ccw(c36.6,-36.6) 40.6,-36.6 40.6,36.6 ccw(c36.6,36.6) 36.6,40.6 -36.6,40.6 ccw(c-36.6,36.6) -40.6,36.6 -40.6,-36.6 ; 7,-2.75 ccw(c7.75,-2.75) 7.75,-3.5 9.75,-3.5 ccw(c9.75,-2.75) 10.5,-2.75 10.5,2.75 ccw(c9.75,2.75) 9.75,3.5 7.75,3.5 ccw(c7.75,2.75) 7,2.75 7,-2.75
  text "Centers of lines define edges on board" at 40.65,-40.017 h1

## Text inside footprints (layer, text, board x,y; h text height)
J200: Mechanical 1 "PCB EDGE" at 5.5,-40.25 h0.61